# EAGLE board board_CI (EAGLE 9.7.0)
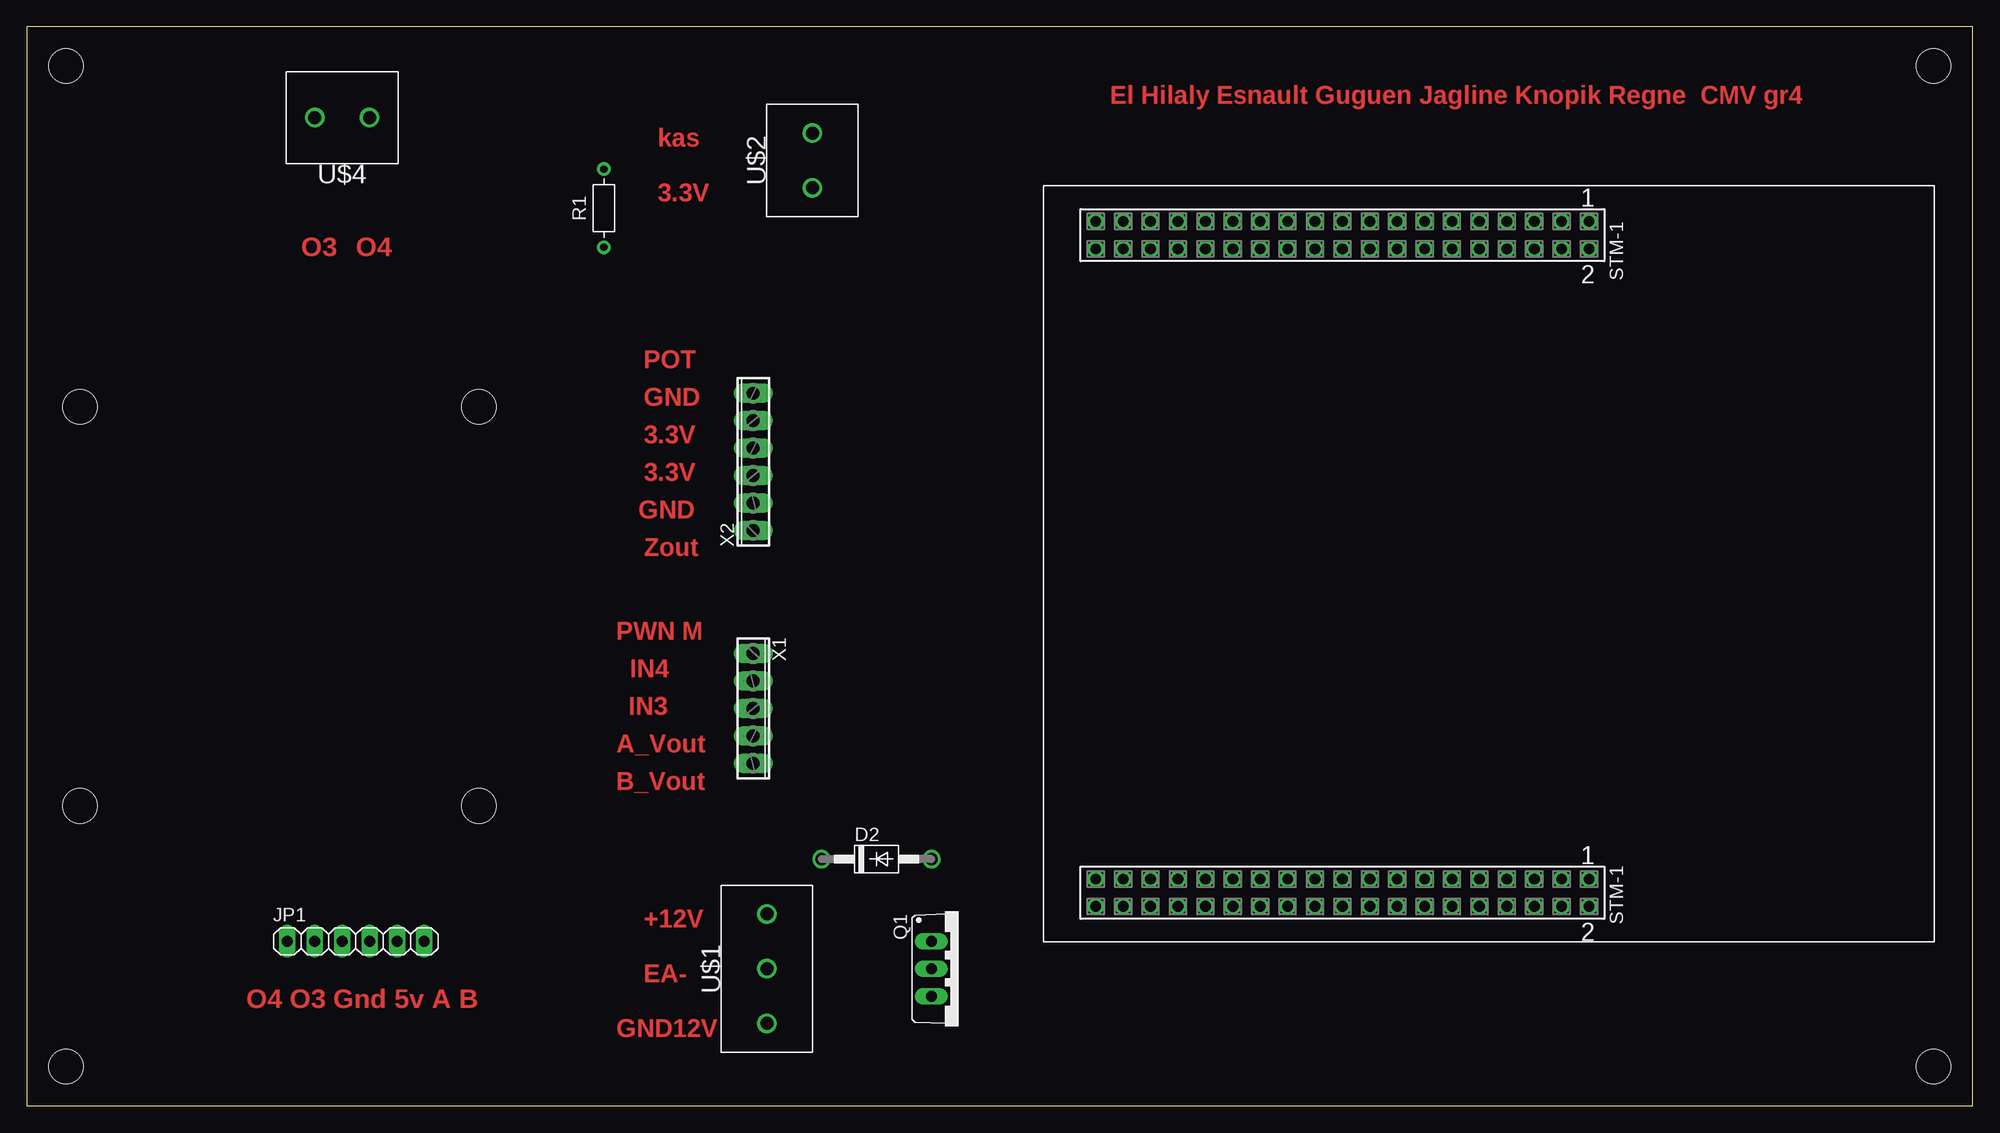
[diagram p0: board, top side]
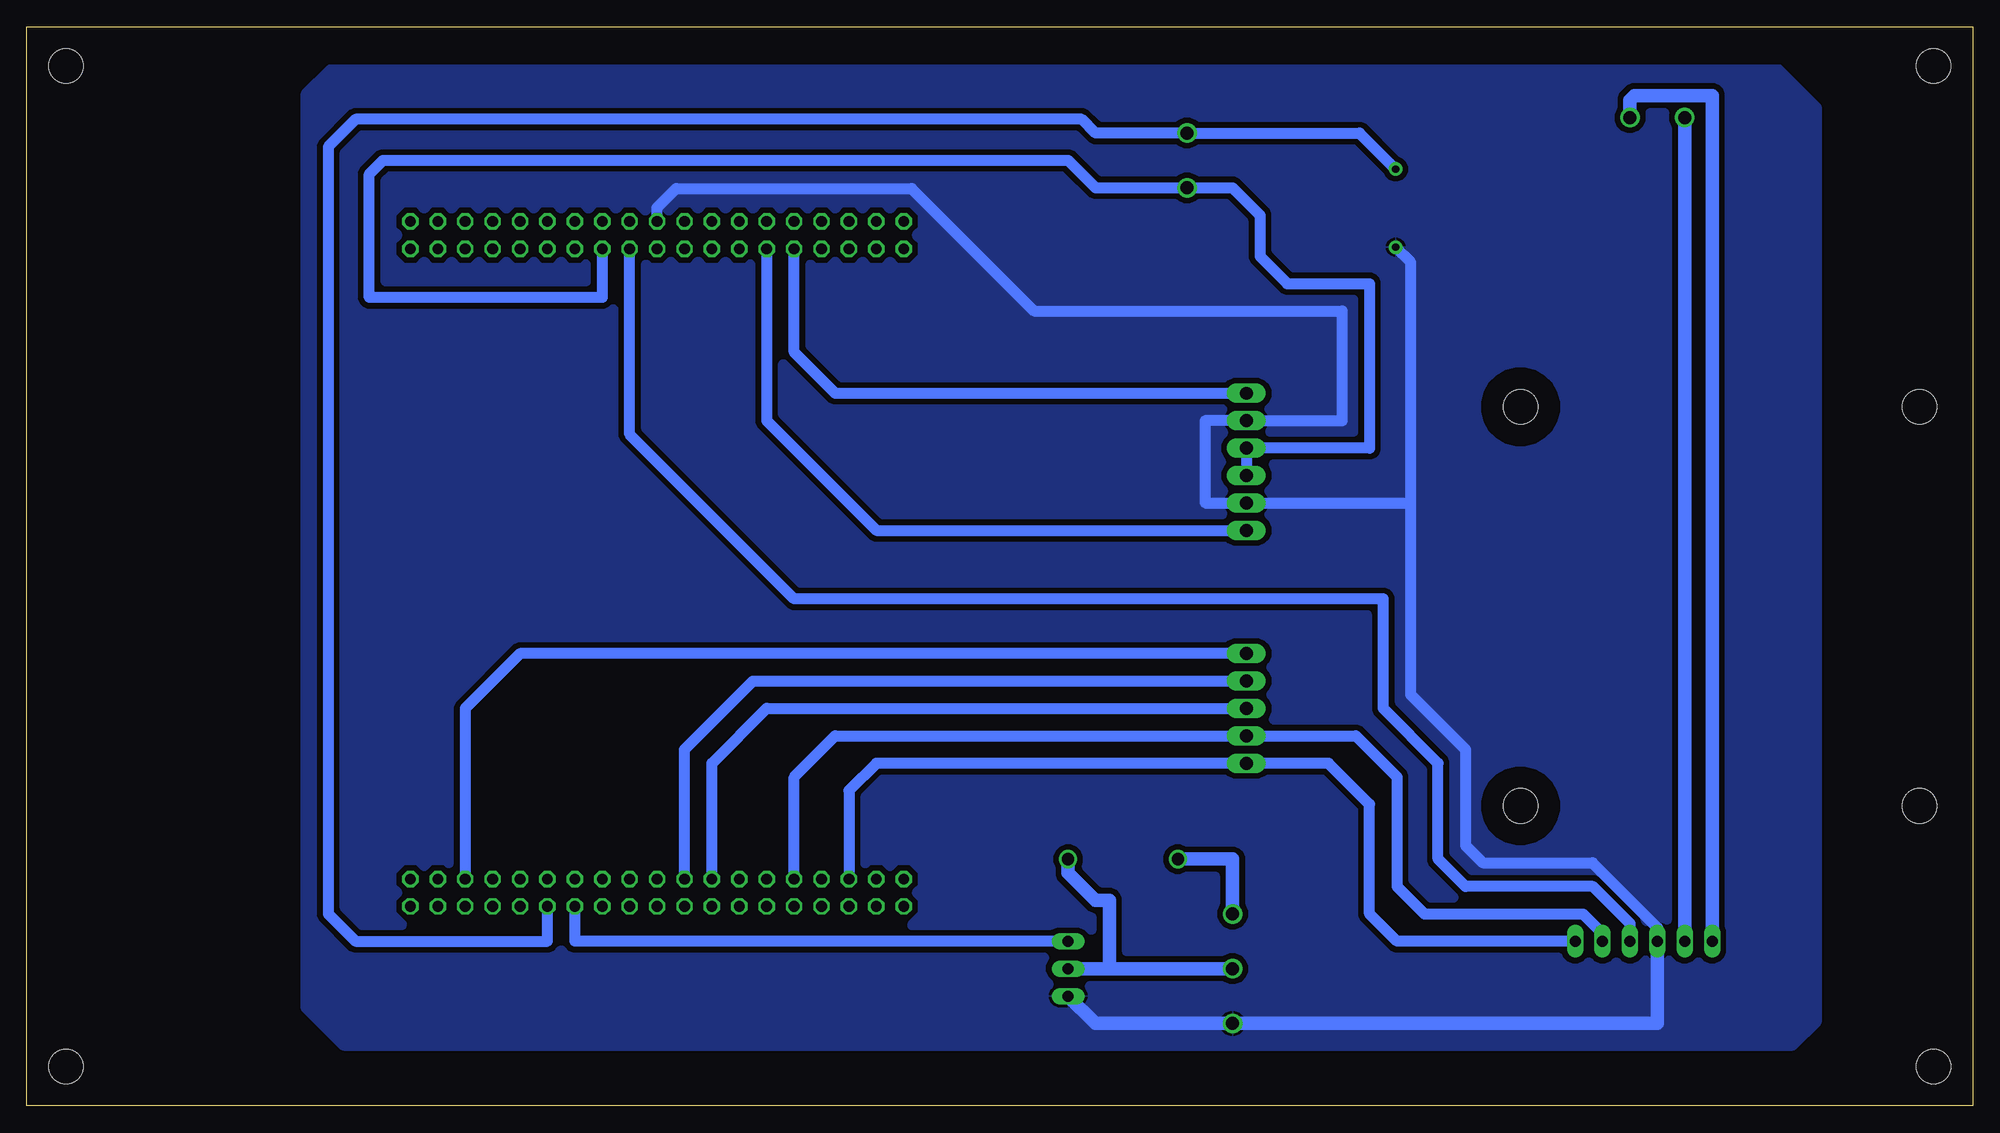
[diagram p1: board, bottom side, seen from below]

Size 180.32 x 100 mm. Coordinates in mm from the lower left corner, seen from the top.
Outline: 0,0 180.32,0 180.32,100 0,100 0,0
Copper layers (1*16): Top 0.035mm / dielectric 1.5mm / Bottom 0.035mm
Design rules "LBMS-ENIB": minimum track width 24mil, minimum drill 10mil, track to track 20mil, track to pad 20mil, pad to pad 20mil, via to via 20mil, smd to smd 8mil, copper to edge 80mil, drill to drill 8mil, minimum pad ring 10mil, minimum via ring 20mil, stop-mask expansion 4mil, vias tented up to drill 0mil, thermal gap 10mil
Holes 3.2 mm at 176.69,96.37 3.63,96.37 3.63,3.63 176.69,3.63 4.9,27.79 41.9,27.79 4.9,64.79 41.9,64.79

## Footprints (pad centres in the part's own frame; a part is rotated, then mirrored left to right if it is on the bottom)
DO41-10 = drill 1.118: A 5.08,0; C -5.08,0
1X06 = drill 1.016 long: 1 -6.35,0; 2 -3.81,0; 3 -1.27,0; 4 1.27,0; 5 3.81,0; 6 6.35,0
TO220BV = drill 1.016 long: D 0,-2.54; G -2.54,-2.54; S 2.54,-2.54
RESAD724W46L381D178B = drill 0.66 pad 1.26: 1 -3.62,0; 2 3.62,0
CONN_STM32_NUCLEO = drill 1 pad 1.5 octagon: 1 -1.27,22.86; 2 1.27,22.86; 3 -1.27,20.32; 4 1.27,20.32; 5 -1.27,17.78; 6 1.27,17.78; 7 -1.27,15.24; 8 1.27,15.24; 9 -1.27,12.7; 10 1.27,12.7; 11 -1.27,10.16; 12 1.27,10.16; 13 -1.27,7.62; 14 1.27,7.62; 15 -1.27,5.08; 16 1.27,5.08; 17 -1.27,2.54; 18 1.27,2.54; 19 -1.27,0; 20 1.27,0; 21 -1.27,-2.54; 22 1.27,-2.54; 23 -1.27,-5.08; 24 1.27,-5.08; 25 -1.27,-7.62; 26 1.27,-7.62; 27 -1.27,-10.16; 28 1.27,-10.16; 29 -1.27,-12.7; 30 1.27,-12.7; 31 -1.27,-15.24; 32 1.27,-15.24; 33 -1.27,-17.78; 34 1.27,-17.78; 35 -1.27,-20.32; 36 1.27,-20.32; 37 -1.27,-22.86; 38 1.27,-22.86; 39 59.69,22.86; 40 62.23,22.86; 41 59.69,20.32; 42 62.23,20.32; 43 59.69,17.78; 44 62.23,17.78; 45 59.69,15.24; 46 62.23,15.24; 47 59.69,12.7; 48 62.23,12.7; 49 59.69,10.16; 50 62.23,10.16; 51 59.69,7.62; 52 62.23,7.62; 53 59.69,5.08; 54 62.23,5.08; 55 59.69,2.54; 56 62.23,2.54; 57 59.69,0; 58 62.23,0; 59 59.69,-2.54; 60 62.23,-2.54; 61 59.69,-5.08; 62 62.23,-5.08; 63 59.69,-7.62; 64 62.23,-7.62; 65 59.69,-10.16; 66 62.23,-10.16; 67 59.69,-12.7; 68 62.23,-12.7; 69 59.69,-15.24; 70 62.23,-15.24; 71 59.69,-17.78; 72 62.23,-17.78; 73 59.69,-20.32; 74 62.23,-20.32; 75 59.69,-22.86; 76 62.23,-22.86
TERMBLK_508-3N = drill 1.2: 1 0,0; 2 5.08,0; 3 10.16,0
TERMBLK_508-2N = drill 1.2: 1 0,0; 2 5.08,0
5POL254 = drill 1.2 long: 1 -5.08,0; 2 -2.54,0; 3 0,0; 4 2.54,0; 5 5.08,0
6POL254 = drill 1.2 pad 1.778 long: 1 -6.35,0; 2 -3.81,0; 3 -1.27,0; 4 1.27,0; 5 3.81,0; 6 6.35,0

## Placement (x,y rotation side)
D2  1N4004FLAT  [DO41-10]  78.74,22.86 0 top
JP1  PINHD-1X6  [1X06]  30.48,15.24 0 top
Q1  NMOSFET  [TO220BV]  86.36,12.7 270 top
R1  1k  [RESAD724W46L381D178B]  53.47,83.2 90 top
STM-1  NUCLEO-F411RE  [CONN_STM32_NUCLEO]  121.92,80.7 270 top
U$1  2828XX-3282837-3  [TERMBLK_508-3N]  68.58,17.78 270 top
U$2  2828XX-2282837-2  [TERMBLK_508-2N]  72.79,90.17 270 top
U$4  2828XX-2282837-2  [TERMBLK_508-2N]  26.67,91.6 0 top
X1  [5POL254]  67.31,36.83 270 top
X2  [6POL254]  67.31,59.69 90 top

## Library data of the parts
D2 = 1N4004
JP1 = Connector; CATEGORY: CONNECTOR; SUB-CATEGORY: PIN-HEADER
Q1 = Transistor; CATEGORY: Transistor; SUB-CATEGORY: MOSFET; TYPE: N-Channel
R1 = Resistor; CATEGORY: Resistor; SUB-CATEGORY: Fixed
STM-1 = prj-ips-jmb
U$1 = Connector; CATEGORY: Connector; DESCRIPTION: TERM BLK 3P SIDE ENT 5.08mm PCB; MANUFACTURER: TE Connectivity; MPN: 282837-3; OPERATING_TEMPERATURE: -40°C to +105°C; PART_STATUS: Active; ROHS_COMPLIANCE: RoHS Compliant; SERIES: 282837; SUBCATEGORY: Terminal Block; TYPE: Side Wire Entry
U$2 U$4 = Connector; CATEGORY: Connector; DESCRIPTION: 2 Position Wire to Board Terminal Block Horizontal with Board 5.08 mm Through Hole; MANUFACTURER: TE Connectivity; MPN: 282837-2; OPERATING_TEMPERATURE: -40°C to +105°C; PART_STATUS: ACTIVE; ROHS_COMPLIANCE: RoHS Compliant; SERIES: 282837; SUBCATEGORY: Terminal Block; TYPE: Side Wire Entry
X1 X2 = con-phoenix-254; OC_FARNELL: unknown; OC_NEWARK: unknown

## Nets
+3.3V: STM-1.16 U$2.2 X2.3 X2.4
+5V: JP1.4 STM-1.18
+12V: D2.C U$1.1
A_VOUT: JP1.5 STM-1.67 X1.4
ACCELEROMETRE: STM-1.28 X2.1
B_VOUT: JP1.6 STM-1.71 X1.5
CMD_EA: Q1.G STM-1.52
DRAIN: D2.A Q1.D U$1.2
GND: JP1.3 Q1.S R1.1 STM-1.19 U$1.3 X2.2 X2.5
KAS: R1.2 STM-1.50 U$2.1
MOTEUR_SENS_1: STM-1.59 X1.2
MOTEUR_SENS_2: STM-1.61 X1.3
OUTPUT_3: JP1.2 U$4.1
OUTPUT_4: JP1.1 U$4.2
POTENTIOMETRE: STM-1.30 X2.6
PWM_MOTEUR: STM-1.43 X1.1

## Tracks (layer width: path | path; a pad name or v marks a point on that pad's centre or on a via)
+3.3V
  Bottom 1.016: STM-1.16 127,74.93 148.59,74.93 148.59,86.36 147.32,87.63 83.82,87.63 81.28,85.09 U$2.2 68.58,85.09 66.04,82.55 66.04,78.74 63.5,76.2 55.88,76.2 55.88,60.96 X2.4 X2.3
+5V
  Bottom 1.016: STM-1.18 124.46,62.23 109.22,46.99 54.61,46.99 54.61,36.83 49.53,31.75 49.53,22.86 46.99,20.32 35.17,20.32 31.75,16.89 JP1.4
+12V
  Bottom 1.27: D2.C 68.58,22.86 U$1.1
A_VOUT
  Bottom 1.016: STM-1.67 109.22,30.48 105.41,34.29 X1.4 57.15,34.29 53.34,30.48 53.34,20.32 50.8,17.78 36.09,17.78 34.29,15.98 JP1.5
ACCELEROMETRE
  Bottom 1.016: STM-1.28 111.76,63.5 101.6,53.34 X2.1
B_VOUT
  Bottom 1.016: STM-1.71 104.14,29.21 101.6,31.75 X1.5 59.69,31.75 55.88,27.94 55.88,17.78 53.34,15.24 JP1.6
CMD_EA
  Bottom 1.016: Q1.G 129.54,15.24 STM-1.52
DRAIN
  Bottom 1.27: 80.01,12.7 Q1.D | 80.01,12.7 U$1.2 | D2.A 83.82,21.59 81.28,19.05 80.01,19.05 80.01,12.7
GND
  Bottom 1.016: 64.77,7.62 U$1.3 | STM-1.19 121.92,83.24 120.15,85.01 98.33,85.01 86.97,73.66 58.42,73.66 58.42,63.5 X2.5 71.12,63.5 71.12,55.88 X2.2 52.07,55.88 | 52.07,55.88 52.07,38.1 46.99,33.02 46.99,24.13 45.39,22.53 35.23,22.53 29.21,16.51 JP1.3 | 52.07,55.88 52.07,78.18 R1.1
  Bottom 1.27: JP1.3 29.21,7.62 U$1.3 81.28,7.62 Q1.S
  pour Bottom: 17.78,96.52 152.4,96.52 154.94,93.98 154.94,8.89 151.13,5.08 16.51,5.08 13.97,7.62 13.97,92.71
KAS
  Bottom 1.016: STM-1.50 132.08,15.24 149.86,15.24 152.4,17.78 152.4,88.9 149.86,91.44 82.55,91.44 81.28,90.17 U$2.1 56.82,90.17 R1.2
MOTEUR_SENS_1
  Bottom 1.016: STM-1.59 119.38,33.02 113.03,39.37 X1.2
MOTEUR_SENS_2
  Bottom 1.016: STM-1.61 116.84,31.75 111.76,36.83 X1.3
OUTPUT_3
  Bottom 1.27: JP1.2 U$4.1
OUTPUT_4
  Bottom 1.27: JP1.1 24.13,93.64 31.33,93.64 31.75,93.22 U$4.2
POTENTIOMETRE
  Bottom 1.016: STM-1.30 109.22,69.85 105.41,66.04 X2.6
PWM_MOTEUR
  Bottom 1.016: X1.1 134.62,41.91 139.7,36.83 STM-1.43

## Text on the board
Top: El Hilaly Esnault Guguen Jagline Knopik Regne CMV gr4 | kas | 3.3V | O3 | O4 | POT | GND | 3.3V | 3.3V | GND | Zout | PWN M | IN4 | IN3 | A_Vout | B_Vout | +12V | EA- | O4 O3 Gnd 5v A B | GND12V